# EAGLE board NeoPixel (EAGLE 6.4)
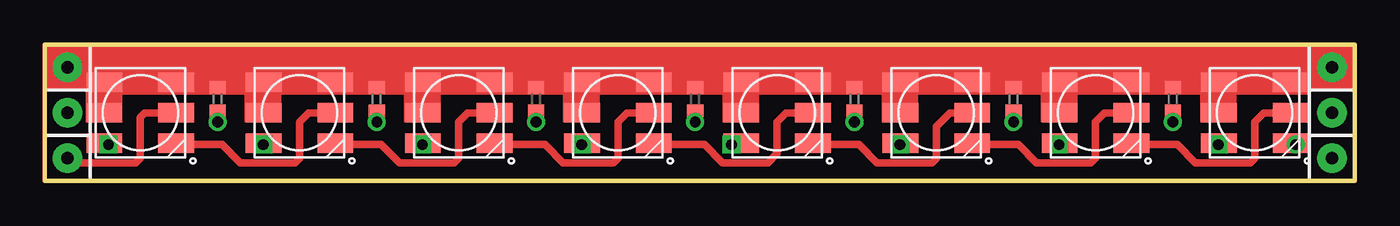
[diagram p0: board, top side]
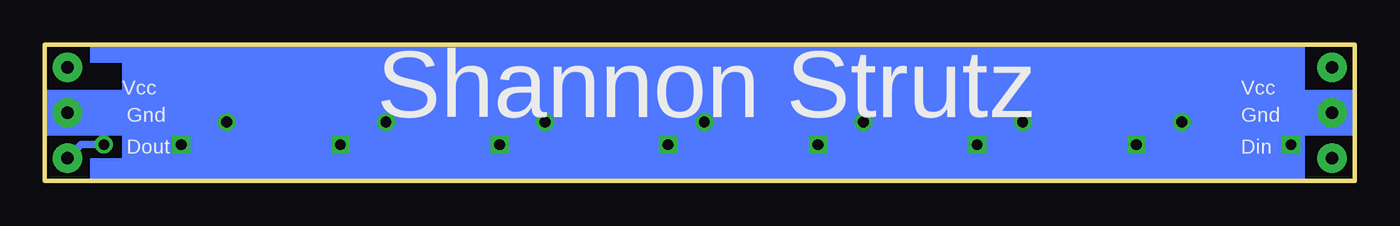
[diagram p1: board, bottom side, seen from below]

Size 73.15 x 7.62 mm. Coordinates in mm from the lower left corner, seen from the top.
Outline: 0,0 0,7.62 73.15,7.62 73.15,0 0,0
Copper layers (1*16): Top 0.035mm / dielectric 1.5mm / Bottom 0.035mm
Design rules "default": minimum track width 10mil, minimum drill 24mil, track to track 8mil, track to pad 8mil, pad to pad 8mil, via to via 8mil, smd to smd 8mil, copper to edge 40mil, drill to drill 8mil, minimum pad ring 10mil, minimum via ring 8mil, stop-mask expansion 4mil, vias tented up to drill 0mil, thermal gap 10mil

## Footprints (pad centres in the part's own frame; a part is rotated, then mirrored left to right if it is on the bottom)
RGBLED5050 = smd 2 x 1.1: 1 -2,1.7; 2 -2,0; 3 -2,-1.7; 4 2,-1.7; 5 2,0; 6 2,1.7
CAP-PTH-SMALLEZ = drill 0.7 pad 1.651: 1 0,0; 2 2.54,0
0402 = smd 0.7 x 0.9: 1 -0.65,0; 2 0.65,0

## Placement (x,y rotation side)
E$1  [RGBLED5050]  5.33,3.81 0 top
E$2  [RGBLED5050]  14.22,3.81 0 top
E$3  [RGBLED5050]  23.11,3.81 0 top
E$4  [RGBLED5050]  32,3.81 0 top
E$5  [RGBLED5050]  40.89,3.81 0 top
E$6  [RGBLED5050]  49.78,3.81 0 top
E$7  [RGBLED5050]  58.67,3.81 0 top
E$8  [RGBLED5050]  67.56,3.81 0 top
E$9  [CAP-PTH-SMALLEZ]  1.27,1.27 90 top
E$10  [CAP-PTH-SMALLEZ]  71.88,3.81 90 top
E$11  [0402]  9.65,4.57 90 top
E$12  [0402]  18.54,4.57 90 top
E$13  [0402]  27.43,4.57 90 top
E$14  [0402]  36.32,4.57 90 top
E$15  [0402]  45.21,4.57 90 top
E$16  [0402]  54.1,4.57 90 top
E$17  [0402]  62.99,4.57 90 top
E$18  [CAP-PTH-SMALLEZ]  71.88,1.27 90 top
E$19  [CAP-PTH-SMALLEZ]  1.27,3.81 90 top

## Library data of the parts
E$1-E$8 = adafruit
E$9 E$10 E$18 E$19 = SparkFun-Passives
E$11-E$17 = inductors

## Nets
S$10: E$10.1
S$20: E$10.2
S$22: E$18.1

## Tracks (layer width: path | path; a pad name or v marks a point on that pad's centre or on a via)
S$1  (via drill 0.6)
  other vias: 3.56,2.03
S$2  (via drill 0.6)
  other vias: 12.19,2.03
S$3  (via drill 0.6)
  other vias: 21.08,2.03
S$4  (via drill 0.6)
  other vias: 29.97,2.03
S$5  (via drill 0.6)
  other vias: 38.35,2.03
S$6  (via drill 0.6)
  other vias: 47.75,2.03
S$7  (via drill 0.6)
  other vias: 56.64,2.03
S$8  (via drill 0.6)
  other vias: 65.53,2.03
S$10
  Bottom 0.406: 67.56,3.81 68.83,3.81 71.63,3.81 E$10.1
S$11
  Top 0.406: 7.37,2.03 9.91,2.03 10.92,1.02 13.97,1.02 14.22,1.27 14.22,3.3 14.73,3.81 16.51,3.81
S$12
  Top 0.406: 16.26,2.03 18.8,2.03 19.81,1.02 22.86,1.02 23.11,1.27 23.11,3.3 23.62,3.81 25.15,3.81
S$13
  Top 0.406: 24.89,2.03 27.94,2.03 28.96,1.02 31.75,1.02 32,1.27 32,3.3 32.51,3.81 34.29,3.81
S$14
  Top 0.406: 34.04,2.03 36.83,2.03 37.85,1.02 40.39,1.02 40.89,1.52 40.89,3.3 41.4,3.81 42.93,3.81
S$15
  Top 0.406: 42.93,2.03 45.47,2.03 46.48,1.02 49.53,1.02 49.78,1.27 49.78,3.05 50.55,3.81 52.07,3.81
S$16
  Top 0.406: 51.82,2.03 54.36,2.03 55.37,1.02 58.42,1.02 58.67,1.27 58.67,3.3 59.18,3.81 60.71,3.81
S$17
  Top 0.406: 60.45,2.03 63.25,2.03 64.26,1.02 67.31,1.02 67.56,1.27 67.56,3.3 68.07,3.81 69.6,3.81
S$18  (via drill 0.6)
  Top 0.406: 9.65,4.06 v9.65,3.3
S$19
  Bottom 0.406: 3.56,3.81 1.27,3.81
S$20
  Top 0.406: E$10.2 71.12,5.59 69.6,5.59
S$22  (via drill 0.6)
  Bottom 0.406: v69.85,2.03 71.12,2.03 E$18.1
S$23  (via drill 0.6)
  Top 0.406: 18.54,4.06 v18.54,3.3
S$24  (via drill 0.6)
  Top 0.406: 27.43,4.06 v27.43,3.3
S$25  (via drill 0.6)
  Top 0.406: 36.32,4.06 v36.32,3.3
S$26  (via drill 0.6)
  Top 0.406: 45.21,3.81 v45.21,3.3
S$27  (via drill 0.6)
  Top 0.406: 54.1,4.06 v54.1,3.3
S$28  (via drill 0.6)
  Top 0.406: 62.99,3.81 v62.99,3.3
S$29
  Top 0.406: 7.37,3.81 5.59,3.81 5.33,3.56 5.33,1.27 5.08,1.02 1.52,1.02 1.27,1.27
(copper drawn outside any net)
  shapes: Bottom area x8, Top area x11

## Text on the board
_bsilk: Vcc | Vcc | Shannon Strutz | Gnd | Gnd | Din | Dout